# Altium PCB E16-02-003.PcbDoc
Units mil, origin at the board's own origin, x right, y up, seen from the top; angles counter-clockwise.
Board outline 5905.51 x 3899.21 mil, 2 copper layers (Top Layer, Bottom Layer), stack 62.8 mil thick; 73 components, 63 nets, 292 pads, 64 vias.
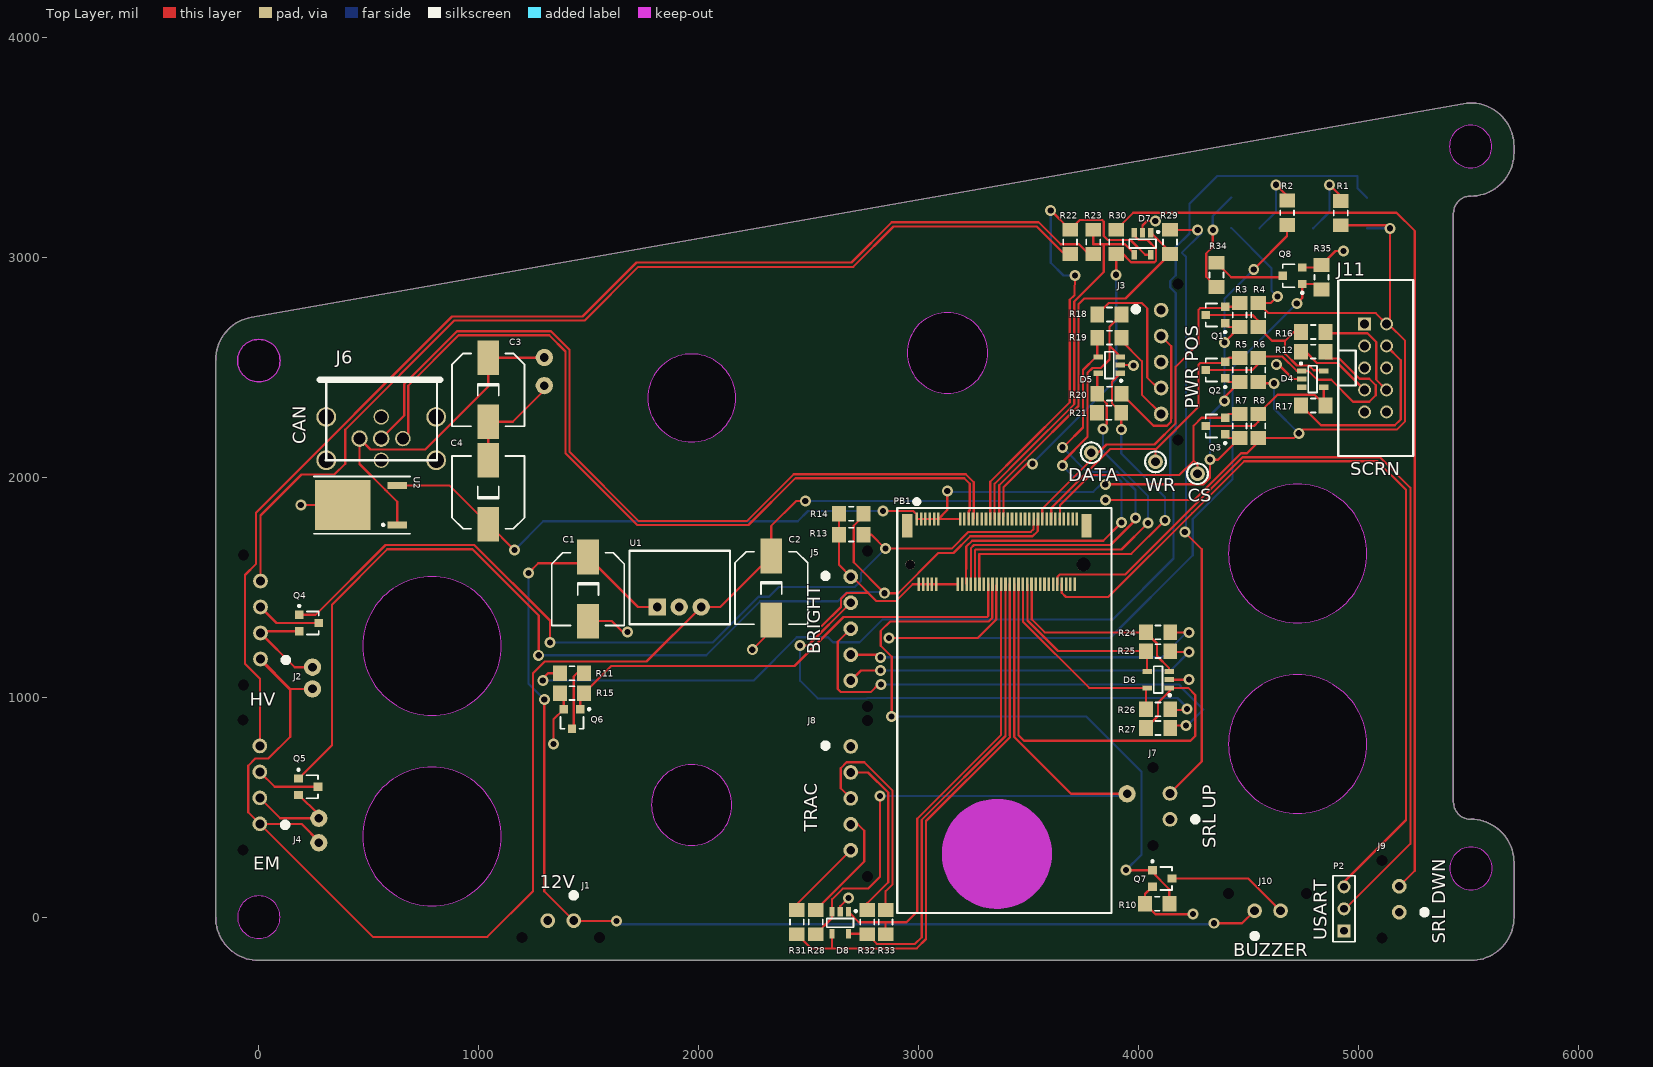
[diagram p0: Top Layer view]
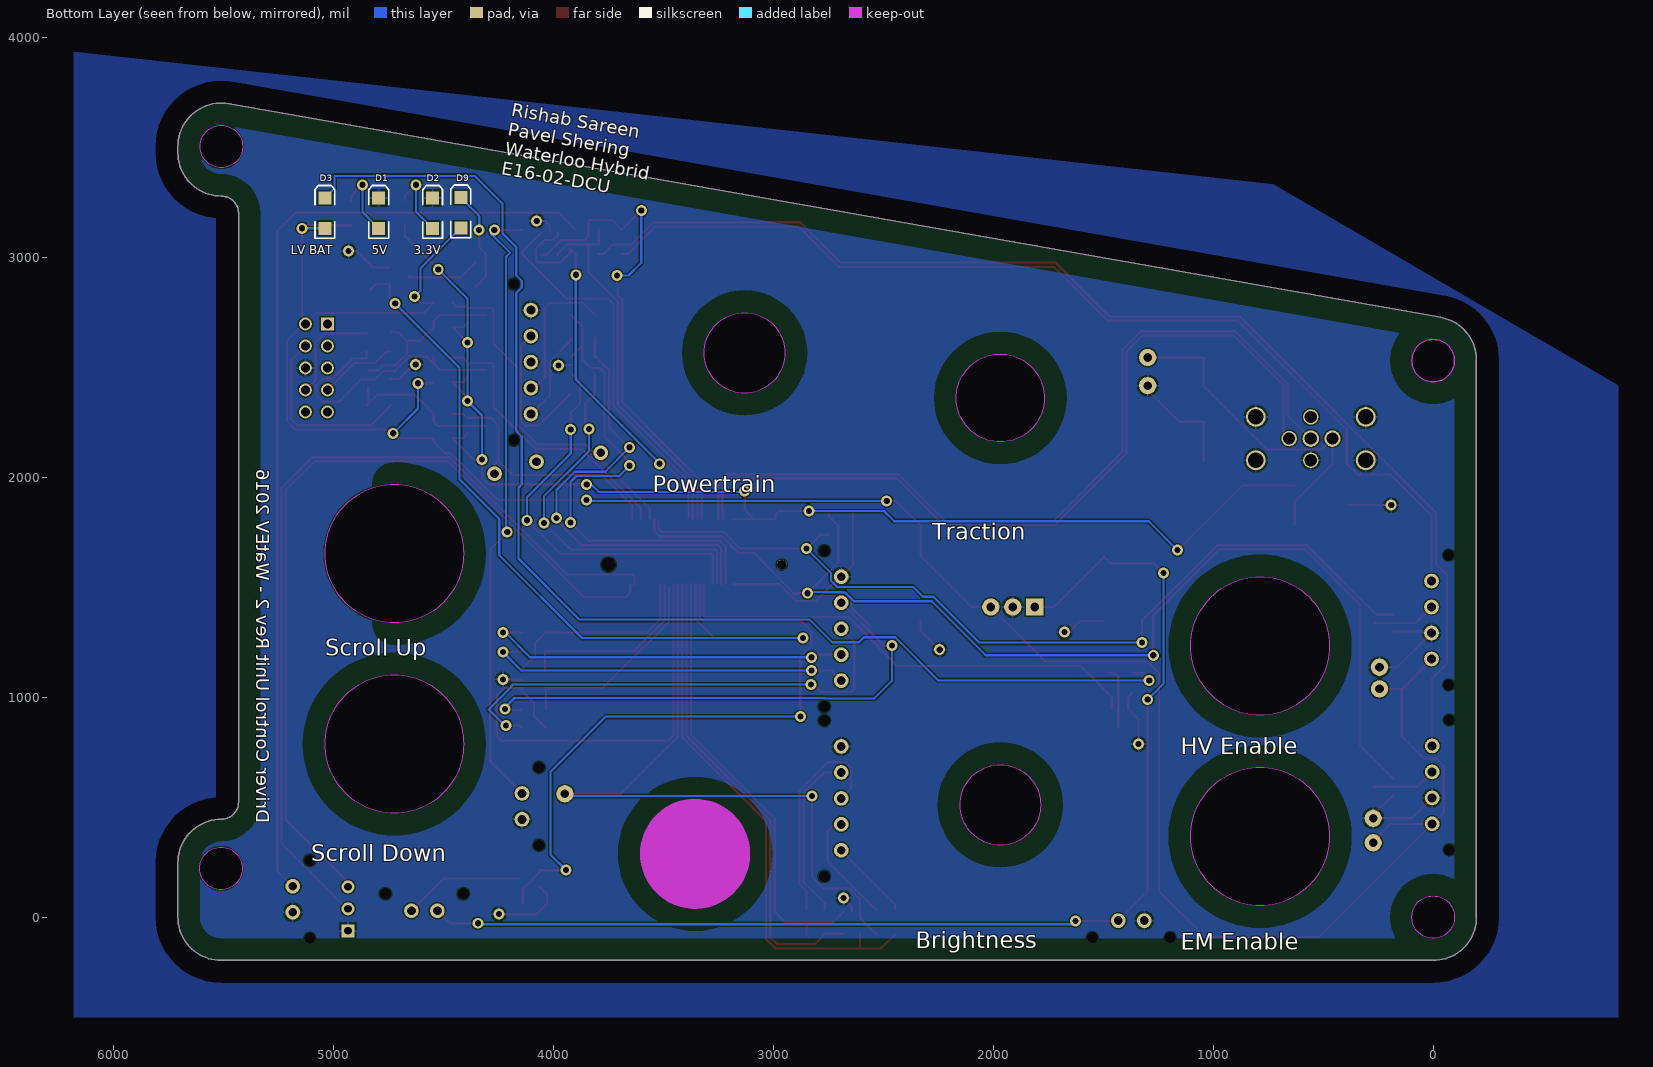
[diagram p1: Bottom Layer view, seen from below]
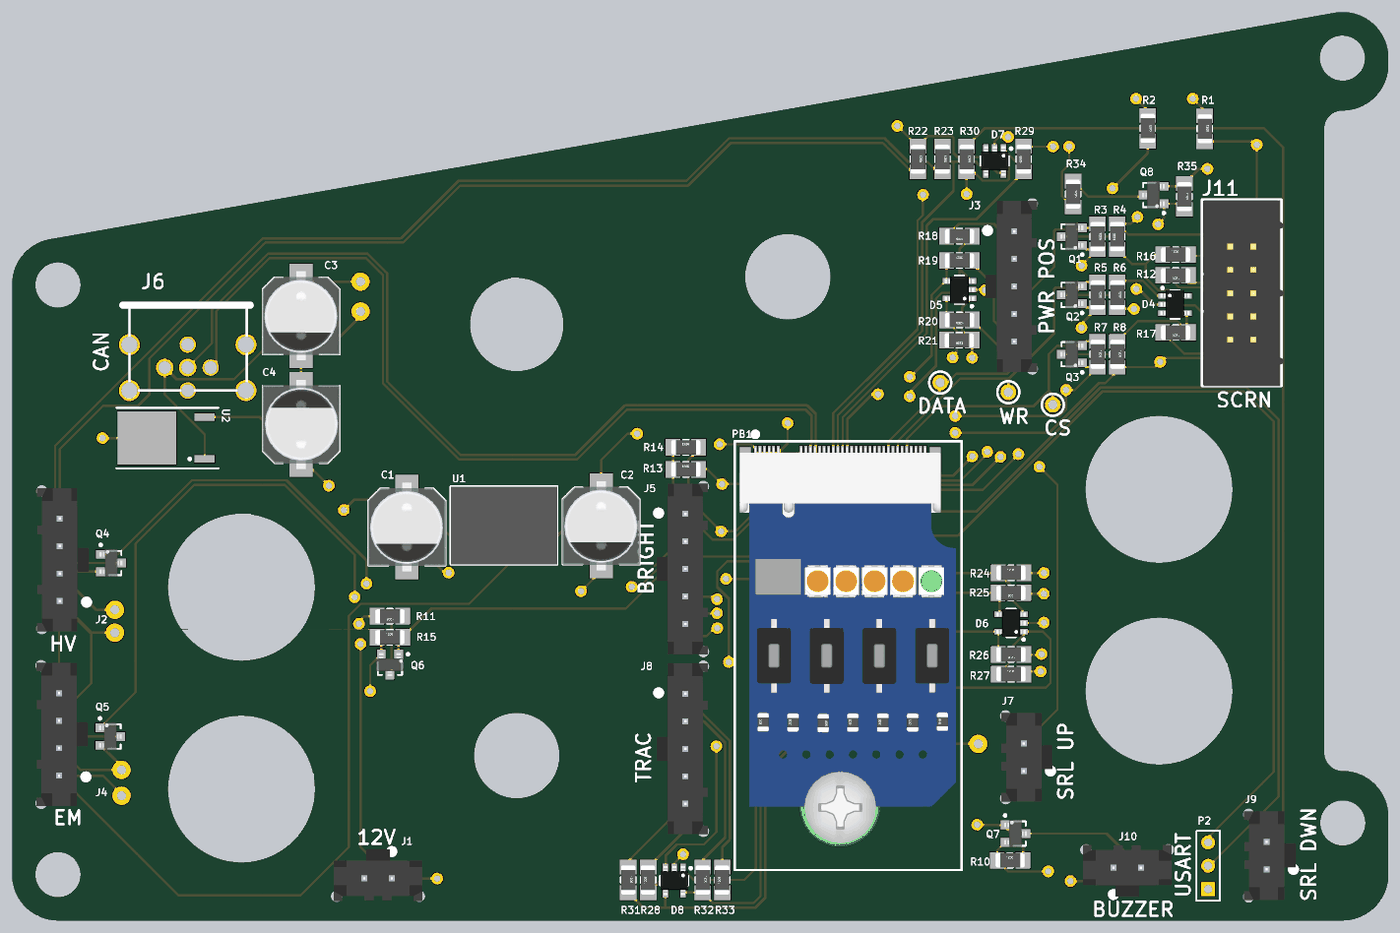
[diagram p2: 3D render of the assembled board from above, using the file's embedded part models]
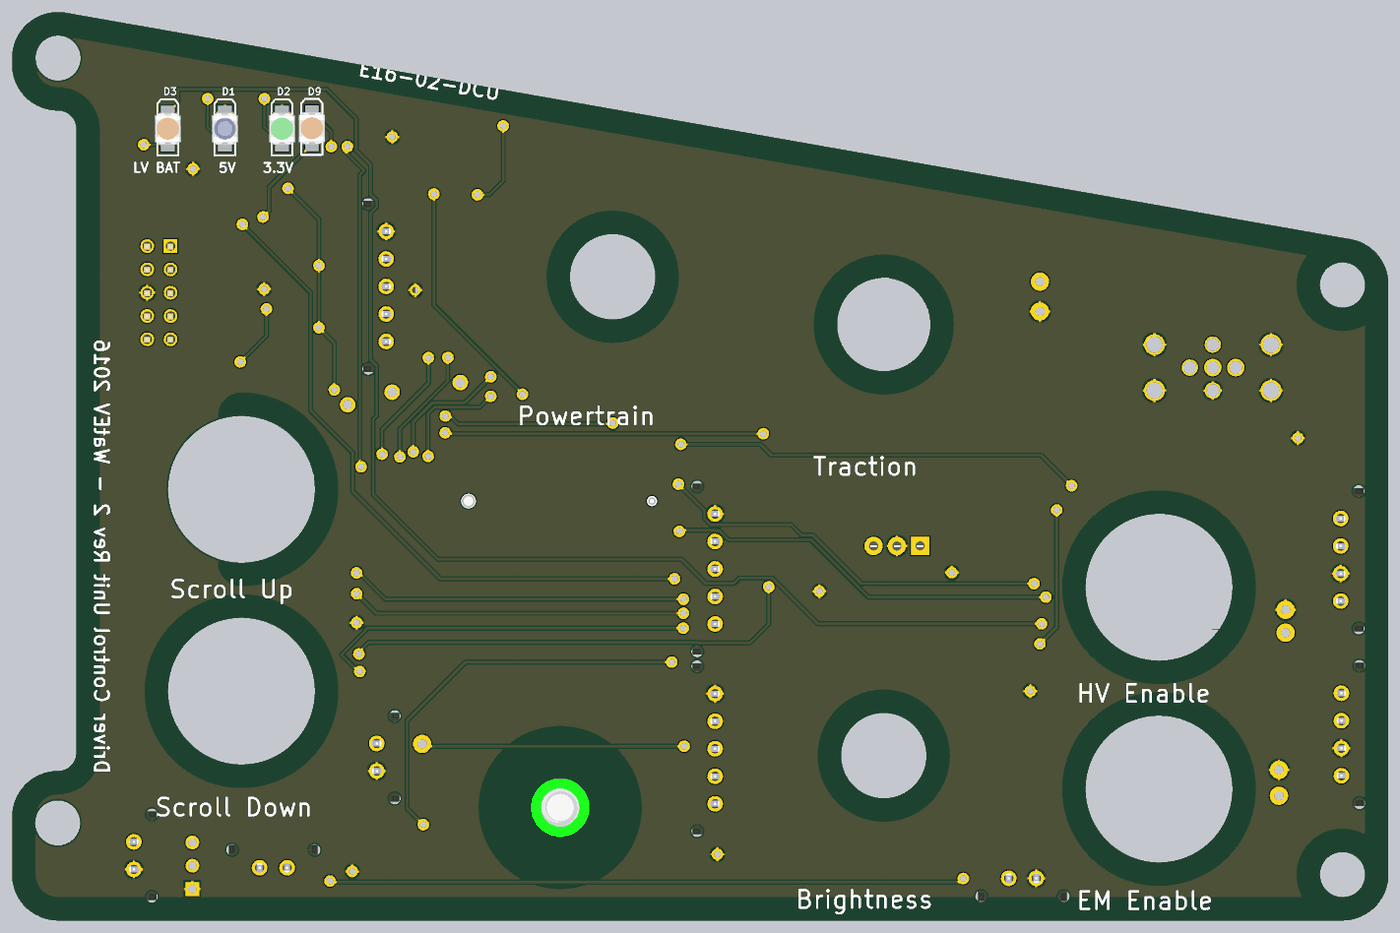
[diagram p3: 3D render of the assembled board from below, using the file's embedded part models]

## Layer stack, top to bottom
Top Solder: solder mask 0.4, Solder Resist, Dk 3.5
Top Layer: signal copper 1.4
Dielectric 1: dielectric 60, FR-4, Dk 4.8
Bottom Layer: signal copper 1.4
Bottom Solder: solder mask 0.4, Solder Resist, Dk 3.5

## Board outline
-197.01,0.12 -197.01,2533.8 cw(c-0.16,2533.8) -34.35,2727.66 5477.47,3699.54 cw(c5511.65,3505.68) 5708.5,3505.68 5708.5,3476.51 cw(c5511.65,3476.51) 5511.65,3279.66 ccw(c5511.65,3200.92) 5432.91,3200.92 5432.91,523.76 ccw(c5511.65,523.76) 5511.65,445.02 cw(c5511.65,248.17) 5708.5,248.17 5708.5,0.12 cw(c5511.65,0.12) 5511.65,-196.73 -0.16,-196.73 cw(c-0.16,0.12)
cut-out: 1785.27,510.8 ccw(c1968.34,510.8) 1968.34,327.73 ccw(c1968.34,510.8) 2151.41,510.8 ccw(c1968.34,510.8) 1968.34,693.87 ccw(c1968.34,510.8)
cut-out: 1768.34,2361.2 ccw(c1968.34,2361.2) 1968.34,2161.2 ccw(c1968.34,2361.2) 2168.34,2361.2 ccw(c1968.34,2361.2) 1968.34,2561.2 ccw(c1968.34,2361.2)
cut-out: 2948.43,2566.29 ccw(c3131.5,2566.29) 3131.5,2383.22 ccw(c3131.5,2566.29) 3314.57,2566.29 ccw(c3131.5,2566.29) 3131.5,2749.36 ccw(c3131.5,2566.29)
cut-out: 5414.44,3504.75 ccw(c5511.19,3504.75) 5511.19,3408 ccw(c5511.19,3504.75) 5607.94,3504.75 ccw(c5511.19,3504.75) 5511.19,3601.5 ccw(c5511.19,3504.75)
cut-out: 5415.98,221.91 ccw(c5512.73,221.91) 5512.73,125.16 ccw(c5512.73,221.91) 5609.48,221.91 ccw(c5512.73,221.91) 5512.73,318.66 ccw(c5512.73,221.91)
cut-out: -96.91,0.12 ccw(c-0.16,0.12) -0.16,-96.63 ccw(c-0.16,0.12) 96.59,0.12 ccw(c-0.16,0.12) -0.16,96.87 ccw(c-0.16,0.12)
cut-out: -0.16,2434.06 cw(c-0.16,2530.81) -96.91,2530.81 cw(c-0.16,2530.81) -0.16,2627.56 cw(c-0.16,2530.81) 96.59,2530.81 cw(c-0.16,2530.81)
cut-out: 472.28,1233.46 ccw(c787.24,1233.46) 787.24,918.5 ccw(c787.24,1233.46) 1102.2,1233.46 ccw(c787.24,1233.46) 787.24,1548.42 ccw(c787.24,1233.46)
cut-out: 472.28,367.31 ccw(c787.24,367.31) 787.24,52.35 ccw(c787.24,367.31) 1102.2,367.31 ccw(c787.24,367.31) 787.24,682.27 ccw(c787.24,367.31)
cut-out: 4409.29,1653.67 ccw(c4724.25,1653.67) 4724.25,1338.71 ccw(c4724.25,1653.67) 5039.21,1653.67 ccw(c4724.25,1653.67) 4724.25,1968.63 ccw(c4724.25,1653.67)
cut-out: 4409.29,787.53 ccw(c4724.25,787.53) 4724.25,472.56 ccw(c4724.25,787.53) 5039.21,787.53 ccw(c4724.25,787.53) 4724.25,1102.49 ccw(c4724.25,787.53)

## Design rules (kind name [scope] priority, off if disabled: settings)
Clearance Clearance_1 [InPolygon vs OnLayer ('Keep-Out Layer')] p1: gap=100 ignorepadtopadclearanceinfootprint=FALSE except(0: Arc-Hole Track-Hole SMDPad-Hole THPad-Hole Via-Hole Fill-Hole Poly-Hole Region-Hole Text-Hole)
Clearance [All] p2: gap=6 ignorepadtopadclearanceinfootprint=FALSE except(0: Arc-Hole Track-Hole SMDPad-Hole THPad-Hole Via-Hole Fill-Hole Poly-Hole Region-Hole Text-Hole; 5: SMDPad-SMDPad; 8: Track-Track)
DiffPairsRouting [All] p1: maxlimit=10 minlimit=8 mostfreqgap=8 toplayer_minwidth=10 toplayer_maxwidth=10 toplayer_prefwidth=10 bottomlayer_minwidth=10 bottomlayer_maxwidth=10 bottomlayer_prefwidth=10 maxuncoupledlength=500
HoleSize [All] p1: absolutevalues=TRUE maxlimit=1000 minlimit=1 maxpercent=80.000 minpercent=20.000
MinimumSolderMaskSliver [All] p1 off: minsoldermaskwidth=10
PlaneClearance PlaneClearance_1 [OnLayer('Mechanical 2')] p1: clearance=20
PlaneClearance [All] p2: clearance=30
PolygonConnect [All] p1: connectstyle=Relief reliefconductorwidth=10 reliefentries=4 polygonreliefangle="90 Angle" airgapwidth=10
RoutingVias [All] p1: holewidth=28 width=50 viastyle="Through Hole" minholewidth=28 minwidth=50 maxholewidth=28 maxwidth=50
SolderMaskExpansion [All] p1: expansion=4
Width [All] p1: maxlimit=20 minlimit=8 preferedwidth=10 minimp=50.000000 maximp=50.000000 favimp=50.000000
26 further rules are at their usual default settings.

## Classes and differential pairs
component class E16-02-002: D3 D4 D5 D6 D7 D8 D9 J1 J2 J3 J4 J5 J6 J7 J8 J9 J11 P1 P2 Q4 Q5 Q6 Q8 R9 R11 R12 R13 R14 R15 R16 R17 R18 R19 R20 R21 R22 R23 R24 R25 R26 R27 R28 R29 R30 R31 R32 R33 R34 R35
component class E16-02-001: C1 C2 C3 C4 CS D1 D2 DATA J10 PB1 Q1 Q2 Q3 Q7 R1 R2 R3 R4 R5 R6 R7 R8 R9 R10 U1 U2 WR
differential pair CAN: +CAN_P -CAN_N

## Components (designator, comment, footprint, x,y, rotation, side; value= is the part's Value field where it differs from the comment)
C1 "UWT1E470MCL1GB" UWT1E470MCL1GB 1497.05,1492.13 r270 top
C2 "UWT1E470MCL1GB" UWT1E470MCL1GB 2330.71,1497.05 r270 top
C3 "UWT1E470MCL1GB" UWT1E470MCL1GB 1043.31,2398.62 r270 top
C4 "UWT1E470MCL1GB" UWT1E470MCL1GB 1043.31,1932.09 r90 top
CS "Test Point" "TEST POINT 5000K" 4268.7,2016.73 r0 top (schematic designator TP1)
D1 "OVS5MBBCR4" OVS5MBBCR4 4795.26,3201.87 r90 bottom
D2 "OVS5MGBCR4" OVS5MGBCR4 4550.25,3201.87 r90 bottom
D3 "OVS5MRBCR4" OVS5MRBCR4 5040.25,3201.87 r90 bottom
D4 "RCLAMP3354S.TCT" SOT95P280X145-5N 4792.74,2447.18 r0 top
D5 "RCLAMP3354S.TCT" SOT95P280X145-5N 3868.17,2510.77 r180 top
D6 "RCLAMP3354S.TCT" SOT95P280X145-5N 4089.59,1080.25 r180 top
D7 "RCLAMP3354S.TCT" SOT95P280X145-5N 4018.87,3063.19 r270 top
D8 "RCLAMP3354S.TCT" SOT95P280X145-5N 2643.88,-25.57 r270 top
D9 "OVS5MRBCR4" OVS5MRBCR4 4422.24,3203.74 r90 bottom
DATA "Test Point" "TEST POINT 5000K" 3785.43,2112.2 r0 top (schematic designator TP2)
J1 "MOLEX 46350-0215" "MOLEX 43650-0215" 1373.03,-15.75 r0 top
J2 "MOLEX 43650-0415" "MOLEX 43650-0415" 7.61,1351.45 r270 top
J3 "43650-0515" "MOLEX 43650-0515" 4103.35,2524.61 r90 top
J4 "MOLEX 43650-0415" "MOLEX 43650-0415" 4.66,601.61 r270 top
J5 "43650-0515" "MOLEX 43650-0515" 2691.93,1312.01 r90 top
J6 "MOLEX 84864-9003" "MOLEX 84864-9003" 556.51,2176.52 r0 top
J7 "MOLEX 46350-0215" "MOLEX 43650-0215" 4143.7,503.94 r270 top
J8 "43650-0515" "MOLEX 43650-0515" 2691.93,540.35 r90 top
J9 "MOLEX 46350-0215" "MOLEX 43650-0215" 5186.02,81.69 r270 top
J10 "MOLEX 46350-0215" "MOLEX 43650-0215" 4587.6,29.53 r180 top
J11 "3020-10-0100-00" "IDC 10 Pos" 5028.54,2697.83 r270 top
P2 "Header 3" HDR1X3 4935.04,-62.01 r90 top
PB1 "ProcBoardRev2" PROC_BOARD 2992.13,1122.05 r0 top
Q1 "N-Channel MOSFET SOT23-3" SOT23-3 4350.26,2738.72 r90 top
Q2 "N-Channel MOSFET SOT23-3" SOT23-3 4350.26,2488.72 r90 top
Q3 "N-Channel MOSFET SOT23-3" SOT23-3 4350.26,2233.72 r90 top
Q4 "2N7002P,215" SOT23-3 227.61,1337.7 r270 top
Q5 "2N7002P,215" SOT23-3 224.66,592.86 r270 top
Q6 "2N7002P,215" SOT23-3 1424.21,901.57 r180 top
Q7 "N-Channel MOSFET SOT23-3" SOT23-3 4108.24,176.17 r270 top
Q8 "2N7002P,215" SOT23-3 4700.79,2917.32 r90 top
R1 "Res" 3216[1206] 4920.28,3201.77 r270 top
R2 "Res" 3216[1206] 4676.18,3203.74 r270 top
R3 "Res" 3216[1206] 4460.26,2738.72 r270 top
R4 "Res" 3216[1206] 4545.26,2738.72 r90 top
R5 "Res" 3216[1206] 4460.26,2488.72 r270 top
R6 "Res" 3216[1206] 4545.26,2488.72 r270 top
R7 "Res" 3216[1206] 4460.26,2233.72 r270 top
R8 "Res" 3216[1206] 4545.26,2233.72 r270 top
R10 "Res" 3216[1206] 4085.61,61.17 r0 top
R11 "Res" 3216[1206] 1424.21,1109.25 r180 top
R12 "Res" 3216[1206] 4795.24,2572.18 r180 top
R13 "Res" 3216[1206] 2694.07,1739.5 r0 top
R14 "Res" 3216[1206] 2694.07,1834.5 r0 top
R15 "Res" 3216[1206] 1424.21,1019.25 r0 top
R16 "Res" 3216[1206] 4795.24,2661.42 r0 top
R17 "Res" 3216[1206] 4795.24,2327.18 r180 top
R18 "Res" 3216[1206] 3868.17,2740.77 r180 top
R19 "Res" 3216[1206] 3868.17,2635.77 r0 top
R20 "Res" 3216[1206] 3868.17,2380.77 r180 top
R21 "Res" 3216[1206] 3867.19,2294.31 r180 top
R22 "Res" 3216[1206] 3689.74,3071.13 r270 top
R23 "Res" 3216[1206] 3794.74,3071.13 r270 top
R24 "Res" 3216[1206] 4089.59,1295.25 r0 top
R25 "Res" 3216[1206] 4089.59,1210.25 r180 top
R26 "Res" 3216[1206] 4089.59,945.25 r180 top
R27 "Res" 3216[1206] 4089.59,860.25 r0 top
R28 "Res" 3216[1206] 2532.48,-22.64 r90 top
R29 "Res" 3216[1206] 4143.87,3071.13 r90 top
R30 "Res" 3216[1206] 3898.87,3071.13 r270 top
R31 "Res" 3216[1206] 2446.85,-22.64 r270 top
R32 "Res" 3216[1206] 2766.73,-22.64 r270 top
R33 "Res" 3216[1206] 2850.39,-22.64 r90 top
R34 "Res" 3216[1206] 4355.31,2921.26 r270 top
R35 "Res" 3216[1206] 4832.68,2910.43 r270 top
U1 "R-78E5.0-1.0" R-78E5.0-1.0 1811.79,1410.89 r0 top
U2 "UA78M33CKVURG3" TO-252-3 255.51,1874.02 r90 top
WR "Test Point" "TEST POINT 5000K" 4077.76,2070.87 r0 top (schematic designator TP3)

## Footprints (in the part's own frame and the unit in brackets; to place one, negate y for a bottom-side part, rotate by r counter-clockwise, add the part's x,y. Pads: shape width x height; smd on the part's side, far side on the other; paste and mask are expansions set on the pad)
3216[1206] [mm] "Chip Resistor; Body 3.2 x 1.6 mm (LxW typ)"
  rect 1.6x1.8 smd: 1(-1.4,0) 2(1.4,0)
  silkscreen extent -0.3,-0.8 0.3,0.8, body extent -1.6,-0.79 1.6,0.81, height 1
HDR1X3 [mm] "Connector; Header; 3 Position"
  rect 1.5x1.5 hole 0.9: 1(0,0)
  round 1.5 hole 0.9: 2(2.54,0) 3(5.08,0)
  silkscreen extent -1.27,-1.27 6.35,1.27
"IDC 10 Pos" [mm] "10 Position (5x2) IDC Connector"
  rect 1.5x1.5 hole 1.02: 1(0,0)
  round 1.5 hole 1.02: 2(0,2.54) 3(2.54,0) 4(2.54,2.54) 5(5.08,0) 6(5.08,2.54) 7(7.62,0) 8(7.62,2.54) 9(10.16,0) 10(10.16,2.54)
  silkscreen extent -5.08,-3.05 15.24,5.61, body extent -5.02,-2.95 15.28,5.87, height 8.89
"MOLEX 43650-0215" [mm] "Through Hole, 2 Pin Connector"
  round 0 hole 1.27 unplated: 0(-4.5,-1.96) 0(4.5,-1.96)
  round 1.7 hole 1.02: 1(1.5,0) 2(-1.5,0)
  silkscreen extent 1.22,2.64 1.78,3.2, body extent -4.82,-2.47 4.83,3.14, height 9.95
"MOLEX 43650-0415" [mm] "Through Hole, 4 Pin Connector"
  round 0 hole 1.27 unplated: 0(-7.5,-1.96) 0(7.5,-1.96)
  round 1.7 hole 1.02: 1(4.5,0) 2(1.5,0) 3(-1.5,0) 4(-4.5,0)
  silkscreen extent 4.34,2.64 4.9,3.2, body extent -7.82,-2.47 7.83,3.14, height 9.95
"MOLEX 43650-0515" [mm] "Through Hole, 5 Pin Connector"
  round 0 hole 1.27 unplated: 0(-9,-1.96) 0(9,-1.96)
  round 1.7 hole 1.02: 1(6,0) 2(3,0) 3(0,0) 4(-3,0) 5(-6,0)
  silkscreen extent 5.81,2.64 6.38,3.2, body extent -9.32,-2.47 9.32,3.14, height 9.95
"MOLEX 84864-9003" [mil]
  round 70 hole 55: 1(0,98.5) 3(0,-98.5) 4(98.5,0)
  round 75 hole 55: 2(-98.5,0) 5(0,0)
  round 90 hole 70: 6(250,98.5) 7(250,-98.5) 8(-250,98.5) 9(-250,-98.5)
  silkscreen extent -278,-98 268,268, body extent -299,-148 299,452, height 710
OVS5MBBCR4 [mm] "SMT LED; 2 Flat Leads; BLUE"
  rect 1.5x1.5 smd: 1(-1.75,0) 2(1.75,0)
  silkscreen extent -2.9,-1.15 3.2,1.15, body extent -1.75,-1.4 1.75,1.4, height 1.6
OVS5MGBCR4 [mm] "SMT LED; 2 Flat Leads; GREEN"
  rect 1.5x1.5 smd: 1(-1.75,0) 2(1.75,0)
  silkscreen extent -2.9,-1.15 3.2,1.15, body extent -1.75,-1.4 1.75,1.4, height 1.6
OVS5MRBCR4 [mm] "SMT LED; 2 Flat Leads; RED"
  rect 1.5x1.5 smd: 1(-1.75,0) 2(1.75,0)
  silkscreen extent -2.9,-1.15 3.2,1.15, body extent -1.75,-1.4 1.75,1.4, height 1.6
PROC_BOARD [mm]
  rect 1.2x2.75 smd: 0(-1.1,16.725) 0(19.6,16.725)
  round 1.1 hole 1.1 unplated paste+0: 0(-0.75,12.225)
  round 0 hole 6.35 unplated: 0(9.258,-21.183)
  round 1.524 hole 1.6 unplated: 0(19.25,12.225)
  rect 0.3x1.55 smd: 1(0,17.5) 2(0.25,9.95) 3(0.5,17.5) 4(0.75,9.95) 5(1,17.5) 6(1.25,9.95) 7(1.5,17.5) 8(1.75,9.95) 9(2,17.5) 10(2.25,9.95) 11(2.5,17.5) 12(4.75,9.95) 13(5,17.5) 14(5.25,9.95) 15(5.5,17.5) 16(5.75,9.95) 17(6,17.5) 18(6.25,9.95) 19(6.5,17.5) 20(6.75,9.95) 21(7,17.5) 22(7.25,9.95) 23(7.5,17.5) 24(7.75,9.95) 25(8,17.5) 26(8.25,9.95) 27(8.5,17.5) 28(8.75,9.95) 29(9,17.5) 30(9.25,9.95) 31(9.5,17.5) 32(9.75,9.95) 33(10,17.5) 34(10.25,9.95) 35(10.5,17.5) 36(10.75,9.95) 37(11,17.5) 38(11.25,9.95) 39(11.5,17.5) 40(11.75,9.95) 41(12,17.5) 42(12.25,9.95) 43(12.5,17.5) 44(12.75,9.95) 45(13,17.5) 46(13.25,9.95) 47(13.5,17.5) 48(13.75,9.95) 49(14,17.5) 50(14.25,9.95) 51(14.5,17.5) 52(14.75,9.95) 53(15,17.5) 54(15.25,9.95) 55(15.5,17.5) 56(15.75,9.95) 57(16,17.5) 58(16.25,9.95) 59(16.5,17.5) 60(16.75,9.95) 61(17,17.5) 62(17.25,9.95) 63(17.5,17.5) 64(17.75,9.95) 65(18,17.5) 66(18.25,9.95) 67(18.5,17.5)
  Keep-Out Layer circle w6.35: c9.258,-21.183 r3.175
  silkscreen extent -2.25,-28 22.5,19.75, body extent -1.7,-25.44 21.89,18.08, height 6.34
R-78E5.0-1.0 [mm] "Recom Power 28V to 5V"
  rect 2x2 hole 1 mask+0.102: 1(0,0)
  round 2 hole 1 mask+0.102: 2(2.54,0) 3(5.08,0)
  silkscreen extent -3.21,-2 8.39,6.5, body extent -3.21,-2.03 8.39,6.47, height 3.61
SOT23-3 [mm] "SOT-23; 3 Leads; Body 3.0 x 2.5 mm, inc. leads (LxW max)"
  rect 0.95x1 smd: 1(-0.95,-1.125) 2(0.95,-1.125) 3(0,1.125)
  silkscreen extent -2.1,-1.25 1.32,1.13, body extent -1.52,-1.24 1.52,1.24, height 1.17
SOT95P280X145-5N [mm] "SOT23, 5-Leads, Body 2.95x2.80mm, Pitch 0.95mm, IPC Medium Density"
  rect 1.1x0.6 smd: 1(-1.275,0.95) 2(-1.275,0) 3(-1.275,-0.95) 4(1.275,-0.95) 5(1.275,0.95)
  silkscreen extent -1.47,-1.55 0.5,1.92, body extent -1.6,-1.48 1.6,1.52, height 0.91
"TEST POINT 5000K" [mm] "Test Point, 5000 Keystone Series, 0.040\" Hole"
  round 1.7 hole 1.02 mask+0.1: 1(0,0)
  silkscreen extent -1.2,-1.2 1.2,1.2
TO-252-3 [mm] "D-PAK/TO-252-3; 3 Leads"
  rect 0.8x2.2 smd: 1(-2.28,-9.5) 3(2.28,-9.5)
  rect 5.8x6.4 smd: 2(0,-3.2)
  silkscreen extent -3.3,-11 3.3,0.13
UWT1E470MCL1GB [mm] "CAP ALUM 47UF 25V 20% SMD"
  rect 4x2.5 smd: 1(-3.7,0) 2(3.7,0)
  silkscreen extent -4.2,-4.2 4.2,4.2, body extent -4.85,-4.25 4.85,4.25, height 10.5

## Part data
C1 C2 C3 C4: "CAP ALUM 47UF 25V 20% SMD"
CS DATA WR: "5000-5004, 5015-5019 Keystone Electronics"
D1: "Typical BLUE LED"
D2: "Typical GREEN LED"
D3 D9: "Typical RED LED"
D4 D5 D6 D7 D8: "TVS DIODE 3.3VWM 16VC"
J1 J7 J9 J10: "Molex 2 Pin Male Header, Vertical, Through Hole"
J2 J4: "Molex 4 Pin Male Header, Vertical, Through Hole"
J3 J5 J8: library part "MOLEX 43650-0515", "Molex 5 Pin Male Header, Vertical, Through Hole"
J6: "CAN Micro-Change M12, Right Angle, Male"
J11: library part IDC_10Pos
P2: "Header, 3-Pin"
PB1: "Processor board that carries the STM32F072RB"
Q1 Q2 Q3 Q7: library part "MOSFET-N SOT23-3"
Q4 Q5 Q6 Q8: "N-Channel Enhancement Mode Vertical DMOS FET"
R1 R2 R3 R4 R5 R6 R7 R8 R10 R11 R12 R13 R14 R15 R16 R17 R18 R19 R20 R21 R22 R23 R24 R25 R26 R27 R28 R29 R30 R31 R32 R33 R34 R35: "Surface Mount Resistor"
U1: "Recom Power 28V to 5V"
U2: "3.3V Regulator"

## Free pads (board coordinates)
  round 78.74 hole 39.37 mask+4: 1(3948.82,561.02) 5(244.09,1136.81) 6(244.09,1038.39) 7(272.64,449.8) 8(272.64,338.58) 9(1298.23,2545.28) 10(1298.23,2417.32)

## Via types
v1: diameter 50, hole 28, Top Layer to Bottom Layer, 64 vias

## Nets (pads, with @x,y where several pads share a name; then routed paths per layer and width w, separated by ;. In a path a pad name is that pad's centre, name@x,y a point inside that pad or via, vN(x,y) a via of type N, cw(c..) or ccw(c..) an arc to the next point about the centre after c; other vN are vias at no path point)
3_3V: C4.1 PB1.1 PB1.3 PB1.5 PB1.7 PB1.9 PB1.11 PB1.13 Q1.1 Q2.1 Q3.1 R2.2 R3.2 R5.2 R7.2 U2.3 | length 6024.3
  Top Layer w10: U2.3 865.94,1963.78 C4.1 1045.28,1786.42 v1(1162.4,1669.29) ; v1(2838.88,1847.15) 2975.5,1847.15 2992.13,1830.52 PB1.1 PB1.3 PB1.5 PB1.7 PB1.9 PB1.11 ; v1(3130.91,1937.99) 3130.91,1851.38 PB1.11 ; PB1.13 PB1.11 ; v1(3849.41,1968.5) 4296.52,1968.5 4325.79,1997.77 v1(4325.79,2080.71) 4362.37,2080.71 R7.2 4412.27,2178.6 Q3.1 ; v1@4391.24,2614.58 R3.2 4412.27,2683.6 Q1.1 ; v1@4391.82,2365.16 R5.2 4412.27,2433.6 Q2.1 ; v1(4524.61,2945.87) 4676.18,3097.44 R2.2
  Bottom Layer w10: v1(1162.4,1669.29) 1293.31,1800.2 2450.79,1800.2 2497.74,1847.15 v1(2838.88,1847.15) ; v1@3138.78,1931.1 3141.83,1934.15 3795.37,1934.15 3829.72,1968.5 v1(3849.41,1968.5) ; v1(4325.79,2080.71) 4325.79,2281.5 v1(4391.73,2347.44) v1(4391.73,2614.09) 4391.73,2812.99 v1(4524.61,2945.87)
5V: C2.1 D3.1 D9.1 J2.1 J4.1 J11.2 pad.6 pad.8 R1.2 R4.2 R6.2 R8.2 U1.3 | length 11333.8
  Top Layer w10: pad.6 143.51,1038.39 J2.1 4.66,1171.33 142.72,1033.28 142.72,820.87 43.31,721.46 -15.75,721.46 -48.23,688.98 -48.23,477.33 J4.1 ; pad.8@278.54,339.57 193.67,424.44 J4.1 ; v1(2485.24,1892.72) 2443.9,1892.72 2330.71,1779.53 C2.1 2098.88,1410.89 U1.3 1763.3,1162.4 1300.2,1162.4 1247.05,1109.25 1247.05,118.11 1039.37,-89.57 518.67,-89.57 J4.1 ; v1(3850.39,1896.65) 4253.09,1896.65 4466.67,2110.24 4494.09,2110.24 4545.26,2161.4 R8.2 4707.14,2178.6 v1(4729.33,2200.79) 4745.75,2217.2 5174.62,2217.2 5212.91,2255.5 5212.91,2621.73 5136.81,2697.83 J11.2 ; R6.2 4550.71,2428.15 v1(4617.13,2428.15) ; v1(4631.89,2822.83) 4602.89,2793.83 R4.2 4592.05,2747.05 5079.33,2747.05 J11.2 ; R1.2 5130.13,3146.65 v1(5143.8,3132.98) 5143.8,2713.09 J11.2
  Bottom Layer w10: v1(2485.24,1892.72) 3846.46,1892.72 v1(3850.39,1896.65) ; D9.1 4605.31,2951.77 4605.31,2849.41 v1(4631.89,2822.83) ; v1(4617.13,2428.15) 4617.13,2312.99 v1(4729.33,2200.79) ; D3.1 v1(5143.8,3132.98)
12V: C1.1 J1.1 J10.1 U1.1 | length 5507.4
  Top Layer w10: v1(1226.38,1564.96) 1270.67,1609.25 1468.5,1609.25 C1.1 1723.95,1410.89 U1.1 ; v1(1298.23,990.16) 1298.23,118.11 J1.1 1433.07,-16.73 v1(1626.97,-16.73) ; v1(4344.49,-27.56) 4471.46,-27.56 J10.1
  Bottom Layer w10: v1(1226.38,1564.96) 1226.38,1062.01 v1(1298.23,990.16) ; v1(1626.97,-16.73) 1626.97,-21.65 1637.8,-32.48 4339.57,-32.48 v1(4344.49,-27.56)
AMS_LED: PB1.30 Q8.1 R35.2 | length 3758.6
  Top Layer w10: v1(2866.14,1269.68) 3269.85,1269.68 3353.52,1353.36 3353.52,1511 PB1.30 ; v1(4720.47,2791.34) 4745.08,2815.94 Q8.1 4808.07,2879.92 R35.2
  Bottom Layer w10: v1(2866.14,1269.68) 3871.06,1269.68 4246.84,1645.46 4246.84,1810.81 4427.73,1991.71 4427.73,2498.6 v1(4720.47,2791.34)
BRIGHT_POS1: D6.3 PB1.46 R24.1 | length 924.2
  Top Layer w10: PB1.46@3515.37,1513.78 3515.37,1354.44 3574.56,1295.25 R24.1 4084.65,1245.08 4084.65,1187.83 4139.79,1132.69 D6.3
BRIGHT_POS2: D6.4 PB1.44 R25.2 | length 854.7
  Top Layer w10: PB1.44@3495.37,1512.5 3495.37,1348.98 3634.1,1210.25 R25.2 4039.39,1205.33 D6.4
BRIGHT_POS3: D6.5 PB1.42 R26.2 | length 948.9
  Top Layer w10: PB1.42@3475.37,1504.22 3475.37,1343.52 3776.05,1042.85 D6.5 4034.47,1037.93 R26.2
BRIGHT_POS4: D6.1 PB1.40 R27.1 | length 2081.2
  Top Layer w10: PB1.40 3454.72,826.77 3479.33,802.17 4237.2,802.17 4258.86,823.82 4258.86,1010.83 4226.83,1042.85 D6.1 4157.7,1042.85 4089.57,974.72 4089.57,915.35 R27.1
BUZZER: PB1.28 Q7.1 R10.2 | length 3111.7
  Top Layer w10: v1(2877.95,912.4) 2877.95,1185.04 2828.74,1234.25 2828.74,1302.17 2871.06,1344.49 3319.19,1344.49 3335.33,1360.63 PB1.28@3335.33,1512.5 ; v1@3944.9,213.57 Q7.1 4063.95,203.73 4140.72,126.96 R10.2
  Bottom Layer w10: v1(2877.95,912.4) 3762.8,912.4 4013.78,661.42 4013.78,284.45 v1(3943.9,214.57)
BUZZER_RET: J10.2 Q7.3 | length 554.9
  Top Layer w10: Q7.3 4500.02,176.17 J10.2
CAN_N: J6.5 PB1.19 | length 3881.5
  Top Layer w10: J6.5 661.13,2281.14 661.13,2424.78 901.01,2664.65 1328.46,2664.65 1412.69,2580.43 1412.69,2116.71 1728.28,1801.11 2219.56,1801.11 2432.5,2014.06 3215.13,2014.06 3250.81,1978.39 3250.81,1813.8 PB1.19
CAN_P: J6.4 PB1.17 | length 3789.2
  Top Layer w10: J6.4 679.13,2200.64 679.13,2417.32 908.46,2646.65 1321,2646.65 1394.69,2572.97 1394.69,2109.25 1720.82,1783.11 2227.01,1783.11 2439.96,1996.06 3207.68,1996.06 3232.81,1970.93 3232.81,1851 3228.35,1846.54 PB1.17
CS_HV: D4.4 Q3.3 R8.1 R17.1 | length 720
  Top Layer w10: Q3.3 4526.04,2233.72 4545.26,2252.94 R8.1 4632.78,2376.35 4801.18,2376.35 R17.1@4842.94,2334.6 ; D4.4 R17.1@4842.94,2334.6 ; R17.1 R17.1@4842.94,2334.6
CS_LV: CS.1 PB1.59 Q3.2 R7.1 | length 1211.3
  Top Layer w10: PB1.59 3643.01,1812.3 3643.01,1872.34 3781.5,2010.83 4186.02,2010.83 4251.17,2075.98 ; CS.1 4268.7,2058.45 4251.17,2075.98 ; R7.1 4412.27,2288.83 Q3.2 4287.31,2271.12 4251.17,2234.99 4251.17,2075.98
DATA_HV: D4.5 Q1.3 R4.1 R16.1 | length 782.1
  Top Layer w10: Q1.3 4519.16,2738.72 4545.26,2712.61 R4.1 4607.3,2621.56 4667.32,2621.56 ; R16.1 4707.18,2661.42 4667.32,2621.56 ; D4.5@4842.94,2487.18 4797.74,2487.18 4776.03,2508.89 4720.92,2508.89 4667.32,2562.49 4667.32,2621.56
DATA_LV: DATA.1 PB1.51 Q1.2 R3.1 | length 1605.1
  Top Layer w10: PB1.51 3562.99,1858.05 DATA.1@3785.43,2080.49 ; DATA.1 DATA.1@3785.43,2080.49 ; R3.1 4442.54,2776.12 Q1.2 4388.35,2769.92 4281.11,2769.92 4273.78,2762.59 4273.78,2607.36 4169.31,2502.89 4169.31,2245.82 4073.09,2149.61 3854.55,2149.61 DATA.1@3785.43,2080.49
EM_ENABLE: D7.4 PB1.29 R23.1 | length 1733.2
  Top Layer w10: PB1.29@3346.14,1811.02 3346.14,1971.61 3476.54,2102.01 3476.75,2102.01 3708.07,2333.33 3708.07,2799.67 3741.72,2833.31 3754.21,2845.8 3779.2,2870.79 3842.67,2934.27 3842.67,3052.68 3835.35,3060 ; R23.1 3794.74,3060 3835.35,3060 ; D7.4 3981.47,3018.02 3939.48,3060 3835.35,3060
EM_LED: PB1.49 Q5.1 R14.2 | length 5214.6
  Top Layer w10: Q5.1 332.68,782.57 332.68,1421.26 584.33,1672.91 971.77,1672.91 1272.64,1372.05 v1(1272.64,1190.94) ; R14.2 2749.19,1824.11 2705.19,1780.11 2705.19,1613.7 v1(2845.47,1473.43) 2907.52,1473.43 3090.28,1656.18 3159.56,1656.18 3235.62,1732.24 3518.66,1732.24 3542.03,1755.61 PB1.49@3542.03,1811.02
  Bottom Layer w10: v1(1272.64,1190.94) 2034.45,1190.94 2280.51,1437.01 2633.82,1437.01 2672.89,1476.08 2687.7,1476.08 2690.08,1478.47 v1@2857.84,1478.47
EM_LED_RET: J4.3 Q5.3 | length 292.4
  Top Layer w10: J4.3 72.46,592.86 Q5.3
GND: C1.2 C2.2 C3.2 C4.2 D1.2 D2.2 D4.2 D5.2 D6.2 D7.2 D8.2 J1.2 J2.2 J3.1 J4.2 J5.1 J6.3 J6.6 J6.7 J6.8 J6.9 J7.1 J8.1 J9.1 J11.6 P2.1 pad.5 pad.7 pad.10 PB1.2 PB1.4 PB1.6 PB1.8 PB1.10 PB1.12 Q4.2 Q5.2 Q6.2 Q7.2 Q8.2 R10.1 R13.1 R14.1 R15.1 R35.1 U1.2 U2.2 | length 4402.2
  Top Layer w10: J4.2 97.41,449.8 pad.7 272.17,468.24 Q5.2 ; Q4.2 15.52,1300.3 J2.2 163.2,1136.81 pad.5@245.08,1136.81 ; v1(190.95,1874.02) U2.2 ; C4.2 C3.2 1154.53,2252.95 pad.10@1289.37,2387.8 ; v1(1339.57,787.4) 1339.57,898.62 Q6.2 1386.81,1001.54 R15.1 ; C1.2 1606.3,1346.46 1656.5,1296.26 v1(1676.18,1296.26) ; v1(2244.09,1216.54) 2330.71,1303.15 C2.2 ; 2561.09,1324.74 2647.46,1411.11 2647.46,1448.54 2673.51,1474.58 2765.57,1474.58 ; R14.1 R13.1 2638.95,1601.2 J5.1 2698.25,1548.23 2809.06,1437.43 2896.98,1437.43 2973.33,1513.78 PB1.2 PB1.4 PB1.6 PB1.8 PB1.10 PB1.12 ; D8.2 2643.88,49.39 v1(2682.09,87.6) ; D5.2 3968.45,2510.77 v1@3969.49,2511.81 ; D7.2 4018.87,3145.84 4039.52,3166.49 v1(4076.97,3166.49) ; Q7.2 4030.49,105.3 R10.1 4077.87,13.78 v1(4249.02,13.78) ; D6.2 4228.87,1080.25 v1(4230.31,1081.69) ; v1(4626.97,2513.78) 4636.81,2513.78 4703.41,2447.18 D4.2 ; Q8.2 4821.85,2954.72 R35.1 4896.65,3029.53 v1(4932.09,3029.53)
  other v1: 3978.35,2508.86
HV_ENABLE: D7.5 PB1.27 R22.1 | length 2250.5
  Top Layer w10: PB1.27@3326.14,1811.02 3326.14,1979.89 3468.26,2122.01 3468.46,2122.01 3688.07,2341.62 3688.07,2807.95 3710,2829.88 v1(3711.61,2918.31) ; v1(3601.38,3213.58) 3602.4,3213.58 R22.1 3733.77,3170.28 3758.86,3170.28 3758.89,3170.24 3835.35,3170.24 3842.67,3162.92 3842.67,3097.84 3860.51,3080 3963.71,3080 4030.72,3012.99 D7.5
  Bottom Layer w10: v1(3601.38,3213.58) 3601.38,2976.38 3659.45,2918.31 v1(3711.61,2918.31)
HV_LED: PB1.47 Q4.1 R13.2 | length 4115.5
  Top Layer w10: Q4.1@182.61,1375.81 Q4.1 258.24,1375.1 576.05,1692.91 980.06,1692.91 1323.82,1349.15 v1(1323.82,1249.02) ; R13.2 2786.09,1739.5 v1(2849.41,1676.18) 3151.27,1676.18 3227.34,1752.24 3510.38,1752.24 3522.91,1764.78 PB1.47@3522.91,1804.68
  Bottom Layer w10: v1(1323.82,1249.02) 2064.24,1249.02 2272.23,1457.01 2320.2,1457.01 2365.45,1502.26 2710.97,1502.26 2737.89,1529.19 2737.89,1564.67 v1(2849.41,1676.18)
HV_LED_RET: J2.3 Q4.3 | length 294.4
  Top Layer w10: J2.3 80.42,1337.7 Q4.3
LOW_BAT_LED: PB1.26 Q6.1 R15.2 | length 2207.9
  Top Layer w10: Q6.1 1461.61,1001.54 R15.2 1602.48,1142.4 2436.43,1142.4 2659.19,1365.16 3312.99,1365.16 3316.93,1369.09 PB1.26
NetD1_1: D1.1 R1.1 | length 323.3
  Top Layer w10: v1(4869.09,3330.71) 4920.28,3279.53 R1.1
  Bottom Layer w10: D1.1 4869.09,3206.81 v1(4869.09,3330.71)
NetD2_1: D2.1 R2.1 | length 321.7
  Top Layer w10: v1(4625.98,3330.71) 4676.18,3280.51 R2.1
  Bottom Layer w10: D2.1 4625.98,3208.71 v1(4625.98,3330.71)
NetD3_2: D3.2 R11.2 | length 5826.1
  Top Layer w10: v1(1291.34,1076.77) 1291.34,1085.63 1314.96,1109.25 R11.2
  Bottom Layer w10: v1(1291.34,1076.77) 2250.12,1076.77 2446.08,1272.74 2588.48,1272.74 2611.22,1250 2732.28,1250 2835.63,1353.35 3881.89,1353.35 4159.45,1630.91 4159.45,1953.74 4144.51,1968.68 4144.51,2185.19 4170.28,2210.95 4170.28,2838.26 4144.51,2864.03 4144.51,2893.85 4170.28,2919.61 4170.28,3047.56 4232.19,3109.47 4232.19,3244.98 4358.27,3371.06 4997.05,3371.06 4997.05,3313.98 D3.2
NetD9_2: D9.2 R34.2 | length 474.3
  Top Layer w10: v1(4338.58,3125) 4338.58,3052.51 4340.55,3050.54 4308.88,3018.87 4308.88,2912.57 R34.2
  Bottom Layer w10: v1(4338.58,3125) 4338.58,3188.98 D9.2
NetJ2_4: J2.4 R22.2 | length 4667
  Top Layer w10: J2.4 7.61,1826.51 193.9,2012.8 343.5,2012.8 392.72,2062.01 392.72,2217.25 889.05,2713.58 1482.02,2713.58 1725.8,2957.36 2703.17,2957.36 2886.55,3140.75 3538.04,3140.75 3662.78,3016.01 R22.2
NetJ3_2: J3.2 R20.1 | length 701.8
  Top Layer w10: R20.1 4068.83,2235.24 4130.44,2235.24 4148.62,2253.42 4148.62,2268.66 4149.31,2269.35 4149.31,2596.75 J3.2
NetJ3_4: J3.4 R18.2 | length 656.8
  Top Layer w10: R18.2 3865.59,2793.31 4015.75,2793.31 4040.35,2768.7 4040.35,2453.74 4087.6,2406.5 J3.4
NetJ3_5: J3.5 R19.2 | length 422
  Top Layer w10: R19.2 3923.29,2621 4015.75,2528.54 4015.75,2375.98 J3.5
NetJ4_4: J4.4 R23.2 | length 5525.9
  Top Layer w10: J4.4@3.75,777.86 J4.4 4.66,1085.31 -62.99,1152.96 -62.99,1556.1 -12.39,1606.71 -12.39,1840.44 878.76,2731.58 1471.74,2731.58 1717.52,2977.36 2694.88,2977.36 2878.27,3160.75 3546.32,3160.75 3647.06,3060 3730.35,3060 3774.35,3016.01 R23.2
NetJ5_2: J5.2 R26.1 | length 2395.9
  Top Layer w10: v1(2461.61,1235.24) 2497.05,1235.24 J5.2 ; J5.2@2697.83,1432.09 J5.2@2706.69,1432.09 ; R26.1 4147.05,942.91 v1@4232.28,942.91
  Bottom Layer w10: v1(2461.61,1235.24) 2461.61,1074.8 2541.34,995.08 2766.26,995.08 2768.33,997.15 4178.05,997.15 v1@4232.28,942.91
  other v1: 4220.47,946.85
NetJ5_3: J5.3 R27.2 | length 2217.1
  Top Layer w10: J5.3 2632.87,1252.95 2632.87,1037.4 2645.67,1024.61 2784.45,1024.61 2817.91,1058.07 v1(2828.74,1058.07) ; R27.2 4156.5,872.05 v1(4216.54,872.05)
  Bottom Layer w10: v1(2828.74,1058.07) 4186.02,1058.07 4193.9,1050.2 4191.93,1048.23 4295.28,944.88 4227.46,877.07 4222.44,872.05 v1(4216.54,872.05)
NetJ5_4: J5.4 R24.2 | length 1675.8
  Top Layer w10: J5.4 2815.94,1193.9 v1(2827.76,1182.09) ; R24.2 v1(4230.31,1295.28)
  Bottom Layer w10: v1(2827.76,1182.09) 4107.28,1182.09 4220.47,1295.28 v1(4230.31,1295.28)
NetJ5_5: J5.5 R25.1 | length 1679.7
  Top Layer w10: J5.5 2738.19,1122.05 v1(2827.76,1122.05) ; R25.1 4149.25,1205.71 v1(4230.31,1205.71)
  Bottom Layer w10: v1(2827.76,1122.05) 4146.65,1122.05 v1(4230.31,1205.71)
NetJ7_2: J7.2 R29.2 | length 2833.3
  Top Layer w10: J7.2 4288.39,707.68 4288.39,1673.52 v1(4210.84,1751.07) ; R29.2 4145.12,3125 v1(4269.69,3125)
  Bottom Layer w10: v1(4210.84,1751.07) 4216.51,1756.75 4216.51,3002.98 4197.83,3021.65 4285.43,3109.25 v1(4269.69,3125)
NetJ8_2: J8.2 R32.1 | length 782.2
  Top Layer w10: J8.2 2770.55,658.46 2862.3,566.71 2862.3,158.56 2766.73,62.99 R32.1
NetJ8_3: J8.3 R33.2 | length 1054
  Top Layer w10: J8.3@2674.96,540.35 2674.96,523.39 J8.3 2645.96,586.32 2645.96,677.5 2672.89,704.43 2752.87,704.43 2882.3,575 2882.3,150.28 2850.39,118.37 R33.2
NetJ8_4: J8.4 R28.2 | length 525
  Top Layer w10: R28.2 2752.95,252.95 2752.95,393.11 2723.82,422.24 J8.4
NetJ8_5: J8.5 R31.1 | length 373.2
  Top Layer w10: R31.1 2446.85,59.05 J8.5
NetJ9_2: J9.2 R30.1 | length 4434
  Top Layer w10: R30.1 3976.37,3203.74 5174.21,3203.74 5256.89,3121.06 5256.89,211.61 J9.2
NetJ11_4: J11.4 R17.2 | length 861.8
  Top Layer w10: R17.2 4830.09,2237.2 5166.34,2237.2 5192.91,2263.78 5192.91,2533.46 J11.4
NetJ11_7: J11.7 R12.2 | length 360.6
  Top Layer w10: R12.2 4759.51,2572.18 4811.02,2520.67 4905.71,2520.67 J11.7
NetJ11_8: J11.8 R16.2 | length 491.1
  Top Layer w10: R16.2 4850.35,2655.81 5042.03,2655.81 5081.69,2616.14 5081.69,2444.69 J11.8
NetQ6_3: Q6.3 R11.1 | length 291.6
  Top Layer w10: Q6.3@1424.21,859.96 1432.09,867.83 1432.09,921.45 1431.91,921.62 1431.91,1094.9 1446.27,1109.25 R11.1
NetQ8_3: Q8.3 R34.1 | length 336.2
  Top Layer w10: R34.1 4421.83,2909.87 4656.5,2909.87 Q8.3
PWR_POS1: D5.3 PB1.16 R18.1 | length 2294.3
  Top Layer w10: PB1.16@3216.22,1518.03 3216.22,1583.27 ; 3217.52,1583.27 3217.52,1685.86 3243.9,1712.24 3840.2,1712.24 v1(3923.23,1795.28) ; v1(3654.53,2053.15) 3654.53,2070.14 3768.07,2183.69 3768.07,2474.61 3791.15,2497.68 3829.37,2497.68 3868.17,2536.48 3868.17,2685.65 R18.1 ; 3868.17,2598.37 D5.3
  Bottom Layer w10: v1(3654.53,2053.15) 3701.67,2006 3896.09,2006 3923.23,1978.86 v1(3923.23,1795.28)
PWR_POS2: D5.4 PB1.18 R19.1 | length 2110.9
  Top Layer w10: PB1.18@3238.14,1513.83 3238.14,1678.2 3252.19,1692.24 3873.23,1692.24 3987.2,1806.22 v1(3987.2,1814.96) ; v1(3654.53,2136.81) 3654.53,2145.67 3664.55,2135.65 3664.55,2143.88 3748.07,2227.41 3748.07,2488.23 3808.02,2548.17 D5.4 3813.06,2553.09 R19.1
  Bottom Layer w10: v1(3654.53,2136.81) 3765.33,2026 3904.37,2026 3987.2,1943.17 v1(3987.2,1814.96)
PWR_POS3: D5.5 PB1.20 R20.2 | length 1784.5
  Top Layer w10: PB1.20@3256.64,1517.26 3256.64,1668.41 3260.47,1672.24 3923.23,1672.24 v1(4044.29,1793.31) ; R20.2@3811.64,2379.35 3856.07,2334.93 3856.07,2242.88 3835.63,2222.44 v1(3838.58,2219.49) ; R20.2 3813.06,2468.45 D5.5
  Bottom Layer w10: v1(3838.58,2219.49) 3838.58,2120.08 4044.29,1914.37 v1(4044.29,1793.31)
PWR_POS4: D5.1 PB1.22 R21.1 | length 1831.2
  Top Layer w10: PB1.22@3276.28,1515.06 3276.28,1651.3 3275.34,1652.24 3968.19,1652.24 v1(4121.06,1805.12) ; D5.1 3879.3,2434.3 3879.3,2337.33 R21.1 v1(3922.31,2218.44)
  Bottom Layer w10: v1(3922.31,2218.44) 3922.31,2109.19 4121.06,1910.43 v1(4121.06,1805.12)
SCROLL_DOWN: D7.3 PB1.33 R30.2 | length 1855.9
  Top Layer w10: PB1.33@3387.09,1823.39 3387.09,1955.98 3493.11,2062.01 v1(3518.7,2062.01) ; v1(3898.87,2921.51) R30.2 3922.87,3040 3922.87,3022.57 3966.61,2978.84 4073.26,2978.84 4080.59,2986.16 4080.59,3039.82 4041.18,3079.23 4001.89,3079.23 3981.47,3099.65 D7.3 D7.3@3981.47,3098.61
  Bottom Layer w10: v1(3518.7,2062.01) 3518.7,2064.96 3898.87,2445.13 v1(3898.87,2921.51)
SCROLL_UP: D7.1 PB1.31 R29.1 | length 1770.3
  Top Layer w10: PB1.31 3367.42,1812.3 3367.42,1964.6 3484.83,2082.01 3485.03,2082.01 3728.07,2325.05 3728.07,2786.99 3754.39,2813.31 3941.17,2813.31 R29.1 4143.87,3025.79 D7.1
TRAC_POS1: D8.3 pad.1 PB1.38 R28.1 | length 3260.5
  Top Layer w10: R28.1 2606.48,-3.76 D8.3 2607.28,25.43 2607.28,81.83 2655.38,129.92 2770.67,129.92 2824.8,184.06 v1(2824.8,551.18) ; PB1.38@3435.35,1513.78 3435.35,855.65 3435.22,855.52 3435.22,819.7 3693.9,561.02 pad.1
  Bottom Layer w10: v1(2824.8,551.18) 3938.98,551.18 pad.1
TRAC_POS2: D8.4 PB1.36 R31.2 | length 2487.2
  Top Layer w10: R31.2 2510.83,-141.73 2625,-141.73 ; D8.4 2606.48,-123.21 2606.48,-141.75 2991.85,-141.75 3034.45,-99.15 3034.45,437.01 3415.67,818.23 3415.67,825.79 3415.35,826.1 PB1.36
TRAC_POS3: D8.5 PB1.34 R32.2 | length 2127.9
  Top Layer w10: D8.5 2764.74,-75.76 R32.2 2810.26,-121.28 ; 2809.78,-121.75 2983.56,-121.75 3014.45,-90.87 3014.45,442.46 3395.67,823.68 PB1.34
TRAC_POS4: D8.1 PB1.32 R33.1 | length 2053.7
  Top Layer w10: D8.1 2728.55,-22.64 2850.39,-22.64 ; R33.1 2850.39,-22.64 ; PB1.32@3375.67,1513.78 3375.67,829.14 2994.45,447.92 2994.45,25.94 2945.87,-22.64 2850.39,-22.64
USART_RX: P2.3 PB1.60 | length 3844
  Top Layer w10: PB1.60 3651.57,1475.24 3671.1,1455.71 3863.05,1455.71 4244.86,1837.52 4480.88,2073.54 5086.9,2073.54 5216.89,1943.54 5216.89,441.89 4935.04,160.04 P2.3
USART_TX: P2.2 PB1.58 | length 3965.6
  Top Layer w10: PB1.58 3631.89,1548.5 3642.01,1558.62 3940.51,1558.62 4224.79,1842.9 4473.43,2091.54 5098.43,2091.54 5236.89,1953.07 5236.89,333.86 4941.02,37.99 P2.2
VCAN: C3.1 J6.2 pad.9 U2.1 | length 1556.1
  Top Layer w10: U2.1 629.53,1889.17 581.67,1937.03 575.22,1943.48 458.01,2060.69 J6.2 508.01,2126.52 756.44,2126.52 1043.31,2413.39 C3.1 1277.56,2544.29 pad.9@1279.53,2542.32
WR_HV: D4.1 Q2.3 R6.1 R12.1 | length 1319.5
  Top Layer w10: Q2.3 4517.26,2488.72 ; R6.1 4545.26,2516.72 4517.26,2488.72 ; R12.1 4850.35,2540.67 4913.99,2540.67 5005.84,2448.82 5050.2,2448.82 5079.72,2419.29 5079.72,2374.02 5050.2,2344.49 4976.38,2344.49 4876.97,2443.9 4812.74,2443.9 4772.05,2484.58 D4.1 4719.78,2484.58 4654.58,2549.78 4578.32,2549.78 4517.26,2488.72
WR_LV: PB1.55 Q2.2 R5.1 WR.1 | length 1375.1
  Top Layer w10: PB1.55 3603.64,1811.02 3603.64,1861.26 3871.99,2129.61 4081.38,2129.61 ; WR.1 4077.76,2125.98 4081.38,2129.61 ; R5.1 4412.27,2543.83 Q2.2 4379.65,2511.22 4379.65,2519.92 4281.11,2519.92 4273.78,2512.59 4273.78,2322.01 4081.38,2129.61
pads on no net: D4.3 J1.0 J2.0 J3.0 J3.3 J4.0 J5.0 J6.1 J7.0 J8.0 J9.0 J10.0 J11.1 J11.3 J11.5 J11.9 J11.10 PB1.0 PB1.14 PB1.15 PB1.21 PB1.23 PB1.24 PB1.25 PB1.35 PB1.37 PB1.39 PB1.41 PB1.43 PB1.45 PB1.48 PB1.50 PB1.52 PB1.53 PB1.54 PB1.56 PB1.57 PB1.61 PB1.62 PB1.63 PB1.64 PB1.65 PB1.66 PB1.67 R21.2

## Polygon pours and split planes (outlines as drawn)
GND on Bottom Layer "Top Layer-No Net" (solid, pour order 5): 6183.07,-454.72 6183.07,1713.58 6183.07,3937.01 728.35,3333.66 -833.66,2424.21 -842.52,2415.35 -842.52,-454.72

## Keep-outs
Keep-Out Layer:
  lines w1: 4724.25,1338.71 cw(c4724.25,1653.67) 4409.29,1653.67 cw(c4724.25,1653.67) 4724.25,1968.63 ; -197.01,0.12 ccw(c-0.16,0.12) -0.16,-196.73 5511.65,-196.73 ccw(c5511.65,0.12) 5708.5,0.12 5708.5,248.17 ccw(c5511.65,248.17) 5511.65,445.02 cw(c5511.65,523.76) 5432.91,523.76 5432.91,3200.92 cw(c5511.65,3200.92) 5511.65,3279.66 ccw(c5511.65,3476.51) 5708.5,3476.51 5708.5,3505.68 ccw(c5511.65,3505.68) 5477.46,3699.54 -34.35,2727.66 ccw(c-0.16,2533.8) -197.01,2533.8 -197.01,0.12 ; -96.91,0.12 ccw(c-0.16,0.12) -0.16,-96.63 ccw(c-0.16,0.12) 96.59,0.12 ccw(c-0.16,0.12) -0.16,96.87 ccw(c-0.16,0.12) -96.91,0.12 ; -96.91,2530.81 ccw(c-0.16,2530.81) -0.16,2434.06 ccw(c-0.16,2530.81) 96.59,2530.81 ccw(c-0.16,2530.81) -0.16,2627.56 ccw(c-0.16,2530.81) -96.91,2530.81 ; 472.28,367.31 ccw(c787.24,367.31) 787.24,52.35 ccw(c787.24,367.31) 1102.2,367.31 ccw(c787.24,367.31) 787.24,682.27 ccw(c787.24,367.31) 472.28,367.31 ; 472.28,1233.46 ccw(c787.24,1233.46) 787.24,918.5 ccw(c787.24,1233.46) 1102.2,1233.46 ccw(c787.24,1233.46) 787.24,1548.42 ccw(c787.24,1233.46) 472.28,1233.46 ; 1768.34,2361.2 ccw(c1968.34,2361.2) 1968.34,2161.2 ccw(c1968.34,2361.2) 2168.34,2361.2 ccw(c1968.34,2361.2) 1968.34,2561.2 ccw(c1968.34,2361.2) 1768.34,2361.2 ; 1785.27,510.8 ccw(c1968.34,510.8) 1968.34,327.73 ccw(c1968.34,510.8) 2151.41,510.8 ccw(c1968.34,510.8) 1968.34,693.87 ccw(c1968.34,510.8) 1785.27,510.8 ; 2948.43,2566.29 ccw(c3131.5,2566.29) 3131.5,2383.22 ccw(c3131.5,2566.29) 3314.57,2566.29 ccw(c3131.5,2566.29) 3131.5,2749.36 ccw(c3131.5,2566.29) 2948.43,2566.29 ; 4409.29,787.53 ccw(c4724.25,787.53) 4724.25,472.56 ccw(c4724.25,787.53) 5039.21,787.53 ccw(c4724.25,787.53) 4724.25,1102.49 ccw(c4724.25,787.53) 4409.29,787.53
Mechanical 1:
  lines w10: -34.35,2727.66 5477.47,3699.54

## Silkscreen, mask and mechanical layers (free items; w line width, h text height)
Top Overlay:
  text "PWR POS" at 4271.65,2312.99 h60 r90
  text "CAN" at 213.58,2151.57 h60 r90
  text "SCRN" at 4963.58,2008.86 h60
  text "BRIGHT" at 2552.17,1195.87 h60 r90
  text "HV" at -42.32,961.61 h60
  text "TRAC" at 2540.35,387.8 h60 r90
  text "SRL UP" at 4352.36,312.99 h60 r90
  text "EM" at -25.59,216.54 h60
  text "12V" at 1276.57,131.89 h60
  text "USART" at 4856.3,-104.33 h60 r90
  text "SRL DWN" at 5395.67,-121.06 h60 r90
  text "BUZZER" at 4431.1,-177.17 h60
Bottom Overlay:
  text "Rishab Sareen / Pavel Shering / Waterloo Hybrid / E16-02-DCU" at 4241.09,3378.99 h60 r10
  text "LV BAT" at 5194.88,3015.75 h40
  text "3.3V" at 4636.81,3014.76 h40
  text "5V" at 4826.77,3014.76 h40
  text "Powertrain" at 3548.23,1933.07 h75
  text "Traction" at 2278.54,1716.54 h75
  text "Scroll Up" at 5039.46,1189.94 h75
  text "HV Enable" at 1147.64,742.13 h75
  text "Driver Control Unit Rev 2 - WatEV 2016" at 5353.35,426.18 h60 r90
  text "Scroll Down" at 5101.38,253.94 h75
  text "Brightness" at 2353.35,-141.73 h75
  text "EM Enable" at 1147.64,-147.64 h75
Mechanical 1:
  circle w0.5: c-0.16,0.12 r96.75
  circle w0.5: c-0.16,2530.81 r96.75
  circle w0.5: c3131.5,2566.29 r183.07
  circle w0.5: c1968.34,510.8 r183.07
  circle w0.25: c5511.65,3502.69 r0.12
  circle w0.5: c1968.34,2361.2 r200
  circle w0.5: c4724.25,1653.67 r314.96
  circle w0.5: c787.24,1233.46 r314.96
  circle w0.5: c787.24,367.31 r314.96
  circle w0.5: c4724.25,787.53 r314.96
  circle w0.25: c5511.89,3503.3 r0.12
  lines w0.5: -197.01,0.12 ccw(c-0.16,0.12) -0.16,-196.73 ; -197.01,2533.8 cw(c-0.16,2533.8) -34.35,2727.66 ; 5432.91,523.76 ccw(c5511.65,523.76) 5511.65,445.02 cw(c5511.65,248.17) 5708.5,248.17 ; 5432.91,3200.92 cw(c5511.65,3200.92) 5511.65,3279.66 ccw(c5511.65,3476.51) 5708.5,3476.51 ; 5477.46,3699.54 cw(c5511.65,3505.68) 5708.5,3505.68 ; 5511.65,-196.73 ccw(c5511.65,0.12) 5708.5,0.12
  lines w1: 4724.25,1338.71 ccw(c4724.25,1653.67) 5039.21,1653.67 ccw(c4724.25,1653.67) 4724.25,1968.63 ; 5414.44,3504.75 ccw(c5511.19,3504.75) 5511.19,3408 ccw(c5511.19,3504.75) 5607.94,3504.75 ccw(c5511.19,3504.75) 5511.19,3601.5 ccw(c5511.19,3504.75) 5414.44,3504.75 ; 5415.98,221.91 cw(c5512.73,221.91) 5512.73,318.66 cw(c5512.73,221.91) 5609.48,221.91 cw(c5512.73,221.91) 5512.73,125.16 cw(c5512.73,221.91) 5415.98,221.91
  lines w10: -197.01,0.12 -197.01,2533.8 cw(c-0.16,2533.8) -34.35,2727.66 5477.47,3699.54 cw(c5511.65,3505.68) 5708.5,3505.68 5708.5,3476.51 cw(c5511.65,3476.51) 5511.65,3279.66 ccw(c5511.65,3200.92) 5432.91,3200.92 5432.91,523.76 ccw(c5511.65,523.76) 5511.65,445.02 cw(c5511.65,248.17) 5708.5,248.17 5708.5,0.12 cw(c5511.65,0.12) 5511.65,-196.73 -0.16,-196.73 ; -195.34,0.12 -98.59,0.12 -0.16,0.12 ; -195.34,2530.81 -98.59,2530.81 -0.16,2530.81 ; -0.16,-195.05 -0.16,-98.3 -0.16,0.12 ; -0.16,195.3 -0.16,98.55 -0.16,0.12 ; -0.16,2335.64 -0.16,2432.39 -0.16,2530.81 ; -0.16,2725.99 -0.16,2629.24 -0.16,2530.81 ; 195.01,0.12 98.26,0.12 -0.16,0.12 ; 195.01,2530.81 98.26,2530.81 -0.16,2530.81 ; 4296.26,2755.37 4358.76,2755.37 ; 5349.74,221.98 5412.24,221.98 ; 5350.72,3502.69 5413.22,3502.69 5511.65,3502.69 ; 5413.22,221.98 5511.65,221.98 ; 5413.46,3503.3 5511.89,3503.3 ; 5511.65,61.06 5511.65,123.56 5511.65,221.98 ; 5511.65,382.91 5511.65,320.41 5511.65,221.98 ; 5511.65,3341.77 5511.65,3404.27 5511.65,3502.69 ; 5511.65,3663.62 5511.65,3601.12 5511.65,3502.69 ; 5511.89,3342.37 5511.89,3404.87 5511.89,3503.3 ; 5511.89,3664.22 5511.89,3601.72 5511.89,3503.3 ; 5672.57,221.98 5610.07,221.98 5511.65,221.98 ; 5672.57,3502.69 5610.07,3502.69 5511.65,3502.69 ; 5672.81,3503.3 5610.31,3503.3 5511.89,3503.3
Mechanical 2:
  circle w0.5: c4724.25,1653.67 r425.2
  circle w0.5: c4724.25,787.53 r425.2
  circle w0.5: c1968.34,510.8 r531.5
  circle w0.5: c3131.5,2566.29 r531.5
  circle w0.5: c1968.34,2361.2 r531.5
  circle w0.5: c787.24,1233.46 r425.2
  circle w0.5: c787.24,367.31 r425.2
  circle w0.5: c4724.25,787.53 r314.96
  circle w0.5: c4724.25,1653.67 r314.96
  circle w0.5: c787.24,1233.46 r314.96
  circle w0.5: c787.24,367.31 r314.96
  lines w10: -197.01,2533.8 -197.01,0.12 ccw(c-0.16,0.12) -0.16,-196.73 5511.65,-196.73 ; 1968.34,2361.2 3131.5,2566.29 ; 5432.91,523.76 5432.91,3200.92 ; 5708.5,0.12 5708.5,248.17